# EAGLE board MagBase (EAGLE 7.1.0)
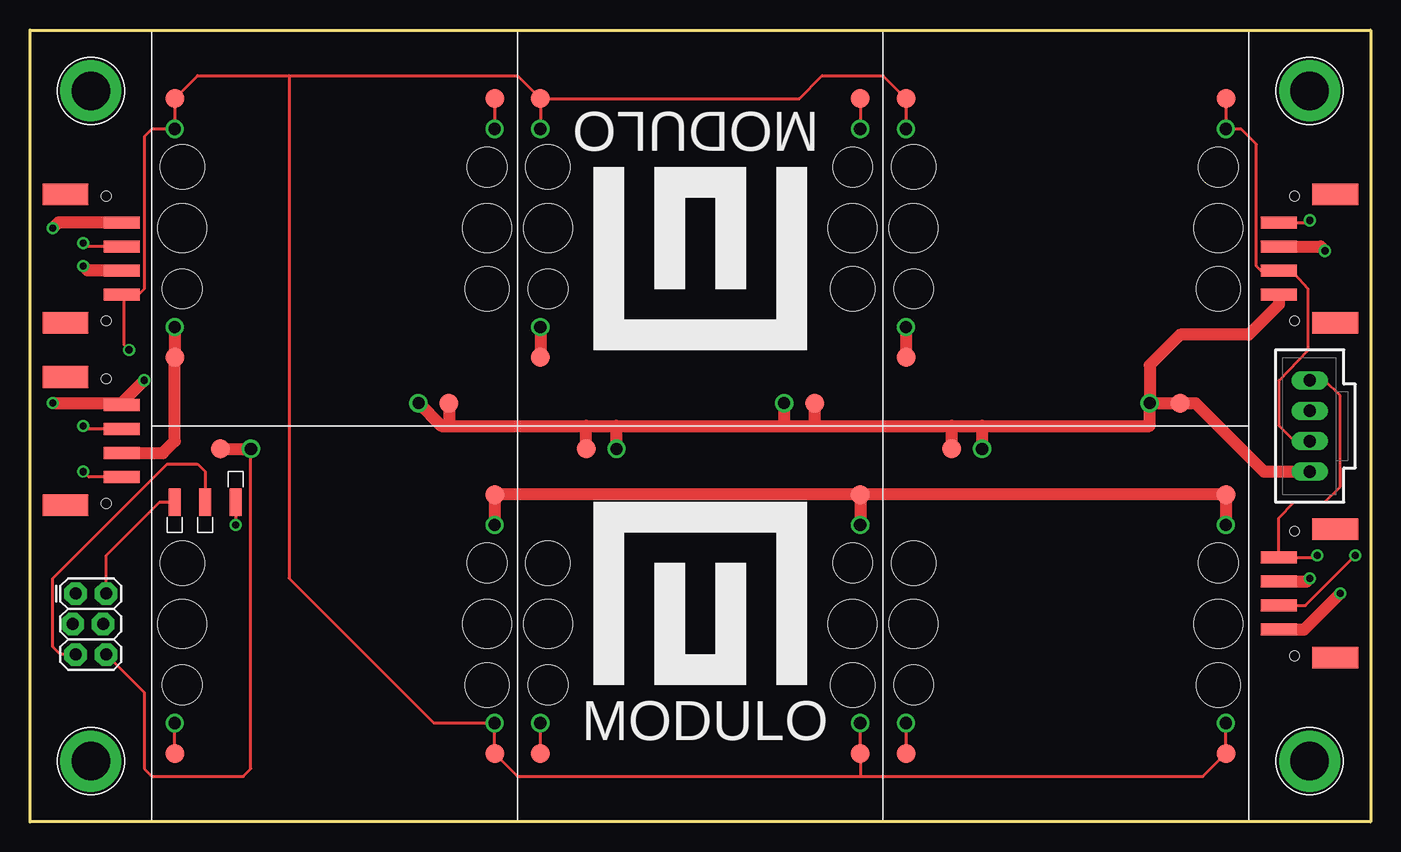
[diagram p0: board, top side]
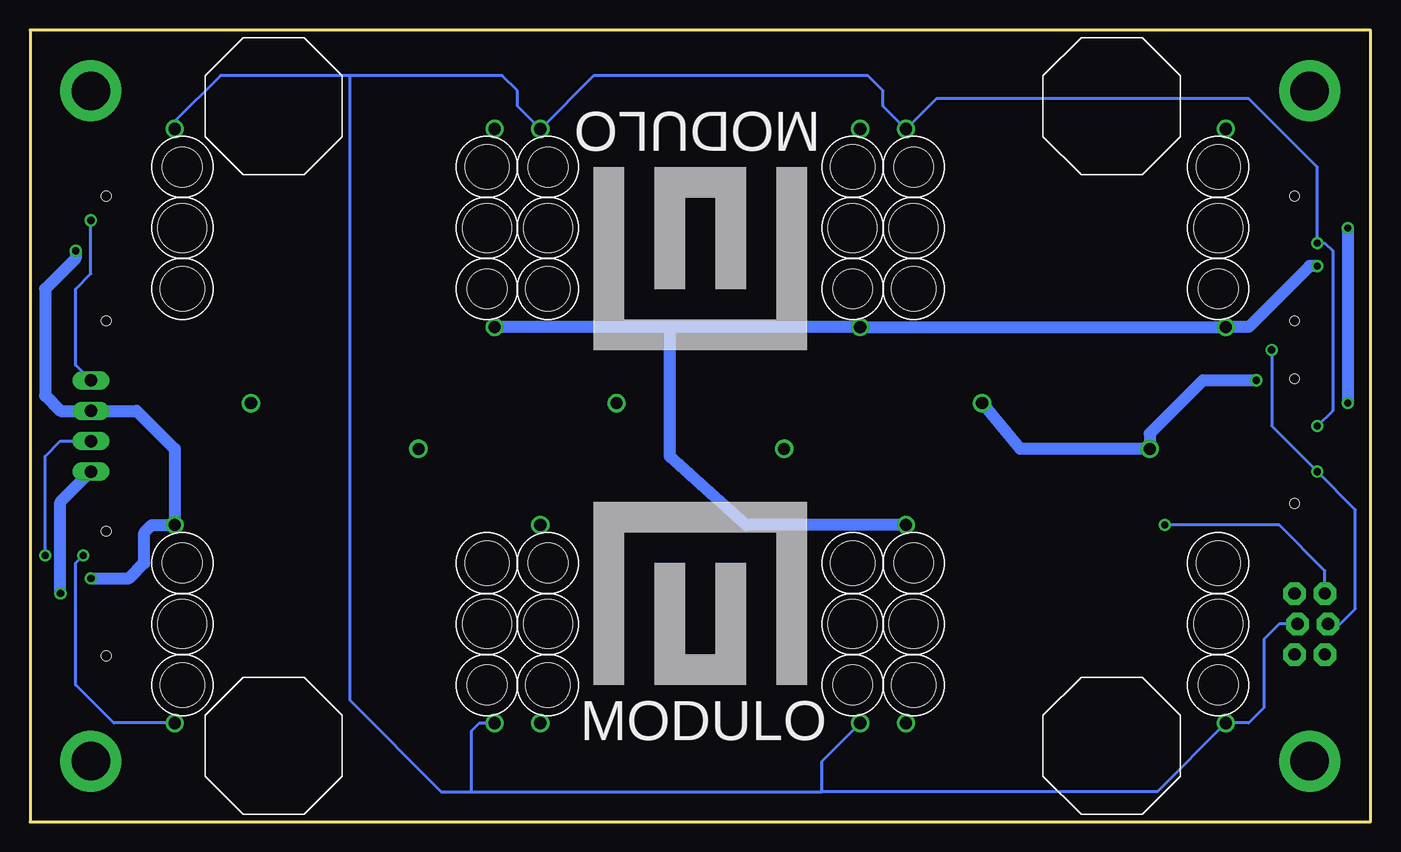
[diagram p1: board, bottom side, seen from below]

Size 111.76 x 66.04 mm. Coordinates in mm from the lower left corner, seen from the top.
Outline: 0,0 0,66.04 111.76,66.04 111.76,0 0,0
Copper layers (1*16): Top 0.0178mm / dielectric 59mil / Bottom 0.0178mm
Design rules "SSC-EAGLE-2Lyr_v1.0.0.3": minimum track width 6mil, minimum drill 14mil, track to track 6mil, track to pad 6mil, pad to pad 6mil, via to via 6mil, smd to smd 6mil, copper to edge 20mil, drill to drill 16mil, minimum pad ring 8mil, minimum via ring 8mil, stop-mask expansion 3mil, vias tented up to drill 0mil, thermal gap 10mil

## Footprints (pad centres in the part's own frame; a part is rotated, then mirrored left to right if it is on the bottom)
2X3_LOCK = drill 1.016 pad 1.88 octagon: 1 0,0; 2 0,2.54; 3 2.54,-0.254; 4 2.54,2.286; 5 5.08,0; 6 5.08,2.54
MAGBASE = smd 1.587 x 1.587: GNDA 5.715,31.115; SCLA 28.575,5.715; SDAA 1.905,5.715; VCCA 28.575,27.305 | drill 1.016: GNDB 8.255,31.115; SCLB 28.575,8.255; SDAB 1.905,8.255; VCCB 28.575,24.765 | hole 4.064: 27.94,16.51; 2.54,16.51 | hole 3.683: 2.54,21.59; 27.94,11.43 | hole 3.302: 2.54,11.43; 27.94,21.59
JST-PA-TOP-SMD = smd 1 x 3: 1 -3,1.3; 2 -1,1.3; 3 1,1.3; 4 3,1.3 | smd 1.8 x 3.8: R1 -5.35,-3.4; R2 5.35,-3.4 | hole 0.8: 5.2,0; -5.2,0
HOLE-#4 = drill 3.198 pad 5.08: P$1 0,0
70543-04 = drill 1.016 long: 1 -3.81,0; 2 -1.27,0; 3 1.27,0; 4 3.81,0
SPRING-CONTACT = smd 2.3 x 1: P$1 0,0

## Placement (x,y rotation side)
FT1  FOOT  [FOOT]  21.59,59.69 90 bottom
FT2  FOOT  [FOOT]  91.44,59.69 0 bottom
FT3  FOOT  [FOOT]  21.59,6.35 0 bottom
FT4  FOOT  [FOOT]  91.44,6.35 0 bottom
J1  AVR_SPI_PRG_62X3_LOCK  [2X3_LOCK]  3.81,19.05 270 top
U$1  MAGBASE  [MAGBASE]  10.16,0 0 top
U$2  MAGBASE  [MAGBASE]  40.64,0 0 top
U$3  MAGBASE  [MAGBASE]  71.12,0 0 top
U$4  MAGBASE  [MAGBASE]  101.6,66.04 180 top
U$5  MAGBASE  [MAGBASE]  40.64,66.04 180 top
U$6  MAGBASE  [MAGBASE]  71.12,66.04 180 top
U$10  JST-PA-TOP-SMD  [JST-PA-TOP-SMD]  105.41,46.99 90 top
U$11  JST-PA-TOP-SMD  [JST-PA-TOP-SMD]  6.35,31.75 270 top
U$12  JST-PA-TOP-SMD  [JST-PA-TOP-SMD]  6.35,46.99 270 top
U$13  HOLE#4  [HOLE-#4]  5.08,5.08 0 top
U$14  HOLE#4  [HOLE-#4]  106.68,5.08 0 top
U$15  HOLE#4  [HOLE-#4]  106.68,60.96 0 top
U$16  HOLE#4  [HOLE-#4]  5.08,60.96 0 top
U$17  JST-PA-TOP-SMD  [JST-PA-TOP-SMD]  105.41,19.05 90 top
X1  C-GRID-04-70543  [70543-04]  106.68,33.02 90 top
X2  SPRING-CONTACT  [SPRING-CONTACT]  12.06,26.67 270 top
X3  SPRING-CONTACT  [SPRING-CONTACT]  14.61,26.67 270 top
X4  SPRING-CONTACT  [SPRING-CONTACT]  17.14,26.67 90 top

## Library data of the parts
FT1-FT4 = Modulo; PARTNUM: SJ6553
J1 = SparkFun-Connectors; PARTNUM: EXCLUDE
U$1-U$6 U$13-U$16 = Modulo; PARTNUM: EXCLUDE
U$10-U$12 U$17 = Modulo; PARTNUM: BM04B-PASS-1-TFT(LF)(SN)
X1 = con-molex; OC_FARNELL: unknown; OC_NEWARK: unknown; PARTNUM: EXCLUDE
X2-X4 = Modulo; PARTNUM: 120220-0314

## Nets
GND: J1.6 U$1.GNDA U$1.GNDB U$2.GNDA U$2.GNDB U$3.GNDA U$3.GNDB U$4.GNDA U$4.GNDB U$5.GNDA U$5.GNDB U$6.GNDA U$6.GNDB U$10.1 U$11.1 U$12.1 U$17.1 X1.1
N$1: J1.1 X4.P$1
N$2: J1.5 X3.P$1
N$3: J1.2 X2.P$1
SCL: J1.3 U$1.SCLA U$1.SCLB U$2.SCLA U$2.SCLB U$3.SCLA U$3.SCLB U$4.SCLA U$4.SCLB U$5.SCLA U$5.SCLB U$6.SCLA U$6.SCLB U$10.4 U$11.4 U$12.4 U$17.4 X1.4
SDA: J1.4 U$1.SDAA U$1.SDAB U$2.SDAA U$2.SDAB U$3.SDAA U$3.SDAB U$4.SDAA U$4.SDAB U$5.SDAA U$5.SDAB U$6.SDAA U$6.SDAB U$10.2 U$11.2 U$12.2 U$17.2 X1.2
VCC: U$1.VCCA U$1.VCCB U$2.VCCA U$2.VCCB U$3.VCCA U$3.VCCB U$4.VCCA U$4.VCCB U$5.VCCA U$5.VCCB U$6.VCCA U$6.VCCB U$10.3 U$11.3 U$12.3 U$17.3 X1.3

## Tracks (layer width: path | path; a pad name or v marks a point on that pad's centre or on a via)
GND  (via drill 0.6)
  Top 0.254: J1.6 9.53,10.79 9.53,4.45 10.16,3.81 17.78,3.81 18.41,4.45 U$1.GNDB
  Top 1.016: U$1.GNDA U$1.GNDB | 34.92,33.02 34.29,33.02 U$5.GNDB | 46.35,33.02 48.9,33.02 | 48.9,33.02 62.87,33.02 | 62.87,33.02 65.41,33.02 | 65.41,33.02 76.83,33.02 | 76.83,33.02 79.38,33.02 | 79.38,33.02 93.34,33.02 U$4.GNDB | U$4.GNDB U$4.GNDA 97.16,34.92 102.87,29.21 X1.1 | U$3.GNDB 79.38,33.02 | U$3.GNDA 76.83,33.02 | U$6.GNDA 65.41,33.02 | U$6.GNDB 62.87,33.02 | U$5.GNDA 34.92,33.02 | U$2.GNDA 46.35,33.02 | U$2.GNDB 48.9,33.02 | 34.92,33.02 46.35,33.02 | U$10.1 104.11,43.15 101.6,40.64 95.89,40.64 93.34,38.1 U$4.GNDB | U$17.1 106.22,16.05 v109.22,19.05 | U$12.1 2.37,49.99 v1.91,49.53 | v1.91,34.92 7.47,34.92 U$11.1 7.65,34.95 v9.53,36.83
  Bottom 1.016: U$5.GNDB 29.21,31.11 U$1.GNDB 18.41,32.38 13.97,36.83 v9.53,36.83 | v109.22,19.05 109.22,26.67 X1.1 | v1.91,49.53 v1.91,34.92
N$1  (via drill 0.6)
  Top 0.254: X4.P$1 v17.14,24.77
  Bottom 0.254: J1.1 3.81,20.95 7.62,24.77 v17.14,24.77
N$2
  Top 0.254: J1.5 2.54,13.97 1.91,14.61 1.91,20.32 11.43,29.84 13.97,29.84 14.61,29.21 X3.P$1
N$3
  Top 0.254: J1.2 6.35,22.23 10.79,26.67 X2.P$1
SCL  (via drill 0.6)
  Top 0.254: U$2.SCLB U$2.SCLA 69.22,3.81 | U$3.SCLB U$3.SCLA 97.79,3.81 69.22,3.81 | U$6.SCLA U$6.SCLB | U$4.SCLB U$4.SCLA 71.12,62.23 66.04,62.23 64.14,60.33 U$6.SCLA | 21.59,62.23 21.59,20.32 33.66,8.26 U$1.SCLB U$1.SCLA 40.64,3.81 69.22,3.81 | 21.59,62.23 13.97,62.23 U$5.SCLA U$5.SCLB 10.16,57.78 9.53,57.15 9.53,44.45 8.89,43.81 7.83,43.81 | 21.59,62.23 40.64,62.23 U$6.SCLA | X1.4 107.95,36.83 109.22,35.56 109.22,27.94 107.95,26.67 105.41,26.67 104.11,25.37 U$17.4 107.14,22.05 v107.31,22.23 | U$10.4 106.5,49.99 v106.68,50.16 | 7.83,43.81 U$12.4 | 7.83,43.81 7.83,39.8 v8.26,39.37 | U$11.4 4.91,28.75 v4.45,29.21
  Bottom 0.254: X1.4 107.95,38.1 107.95,44.45 106.68,45.72 v106.68,50.16 | v8.26,39.37 8.26,33.02 v4.45,29.21 1.27,26.04 1.27,17.78 2.54,16.51 J1.3 | U$3.SCLB 104.78,8.26 107.95,11.43 107.95,21.59 v107.31,22.23
SDA  (via drill 0.6)
  Top 0.254: U$1.SDAA U$1.SDAB | U$2.SDAA U$2.SDAB | U$5.SDAA U$5.SDAB | U$6.SDAA U$6.SDAB | U$4.SDAA U$4.SDAB 100.97,57.78 102.23,56.52 102.23,46.35 102.6,45.99 U$10.2 104.38,45.72 105.41,45.72 106.55,44.45 106.55,39.37 104.14,36.83 104.14,33.02 105.41,31.75 X1.2 | U$3.SDAB U$3.SDAA | U$17.2 106.31,18.05 v110.49,22.23 | U$12.2 4.71,47.99 v4.45,48.26 | U$11.2 4.71,32.75 v4.45,33.02
  Bottom 0.254: 85.09,62.23 85.09,10.16 77.47,2.54 74.93,2.54 | 85.09,62.23 72.39,62.23 71.12,60.96 71.12,59.69 U$6.SDAB 64.77,62.23 41.91,62.23 40.64,60.96 40.64,59.69 U$5.SDAB 36.2,60.33 10.16,60.33 4.45,54.61 v4.45,48.26 3.81,48.26 3.17,47.62 3.17,34.29 v4.45,33.02 | 85.09,62.23 95.89,62.23 99.69,58.42 U$4.SDAB | 74.93,2.54 45.72,2.54 | 74.93,2.54 74.93,7.62 74.3,8.26 U$3.SDAB | 45.72,2.54 17.78,2.54 U$1.SDAB 10.16,8.26 8.89,9.53 8.89,15.24 7.62,16.51 J1.4 | 45.72,2.54 45.72,5.08 U$2.SDAB | v110.49,22.23 110.49,30.48 109.22,31.75 X1.2
VCC  (via drill 0.6)
  Top 1.016: U$2.VCCA U$3.VCCA U$3.VCCB | U$2.VCCA U$1.VCCA U$1.VCCB | U$5.VCCB U$5.VCCA 12.06,31.75 11.06,30.75 U$11.3 | U$6.VCCB U$6.VCCA | U$2.VCCA U$2.VCCB | U$4.VCCB U$4.VCCA | U$17.3 106.41,20.05 v106.68,20.32 | U$10.3 107.58,47.99 v107.95,47.62 | U$12.3 4.81,45.99 v4.45,46.35
  Bottom 1.016: 58.42,41.27 U$6.VCCB U$5.VCCB 10.16,41.27 5.08,46.35 v4.45,46.35 | 58.42,41.27 U$4.VCCB | U$1.VCCB 52.07,24.77 58.42,30.48 58.42,41.27 | v106.68,20.32 103.5,20.32 102.23,21.59 102.23,24.13 101.6,24.77 U$3.VCCB 99.69,31.11 102.87,34.29 X1.3 109.22,34.29 110.49,35.56 110.49,44.45 107.95,46.99 v107.95,47.62

## Text on the board
tPlace: MODULO | MODULO
bPlace: MODULO | MODULO